# EAGLE board WarningFlasher (EAGLE 5.11)
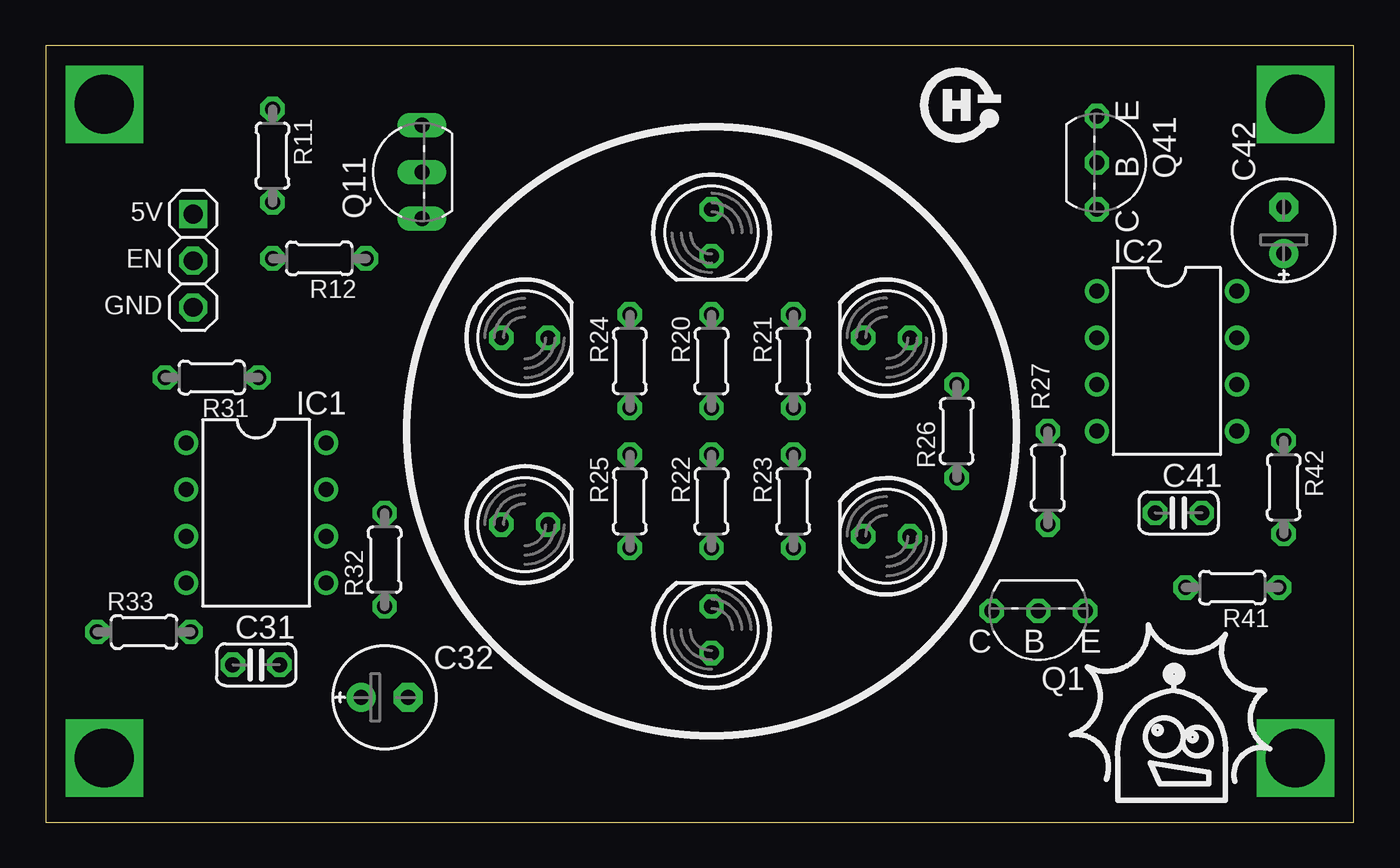
[diagram p0: board, top side]
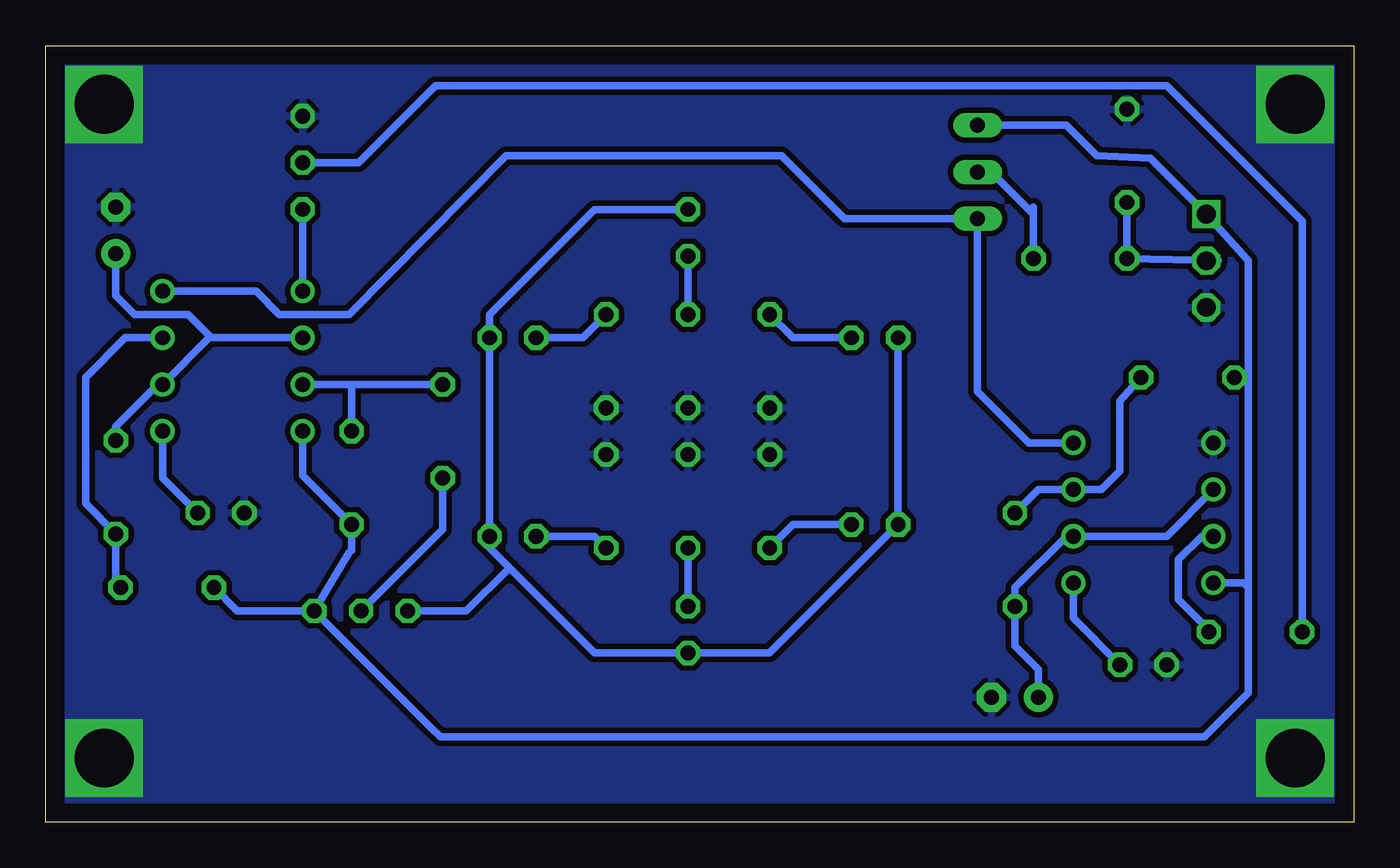
[diagram p1: board, bottom side, seen from below]

Size 71.11 x 42.22 mm. Coordinates in mm from the lower left corner, seen from the top.
Outline: 0,42.22 0,0 71.11,0 71.11,42.22 0,42.22
Copper layers (1*16): Top 0.035mm / dielectric 1.5mm / Bottom 0.035mm
Design rules "default": minimum track width 10mil, minimum drill 24mil, track to track 8mil, track to pad 8mil, pad to pad 8mil, via to via 8mil, smd to smd 8mil, copper to edge 40mil, drill to drill 8mil, minimum pad ring 10mil, minimum via ring 8mil, stop-mask expansion 4mil, vias tented up to drill 0mil, thermal gap 10mil

## Footprints (pad centres in the part's own frame; a part is rotated, then mirrored left to right if it is on the bottom)
C025-024X044 = drill 0.813 octagon: 1 -1.27,0; 2 1.27,0
E2,5-6E = drill 0.813 pad 1.575 round: + -1.27,0 | drill 0.813 pad 1.575 octagon: - 1.27,0
DIL08 = drill 0.813 pad 1.27 round: 1 -3.81,-3.81; 2 -1.27,-3.81; 3 1.27,-3.81; 4 3.81,-3.81; 5 3.81,3.81; 6 1.27,3.81; 7 -1.27,3.81; 8 -3.81,3.81
1X03-S = drill 1.016 square: 1 -2.54,0 | drill 1.016 octagon: 2 0,0; 3 2.54,0
LED5MM = drill 0.813 octagon: A -1.27,0; K 1.27,0
TO92-CBE = drill 0.813 octagon: B 0,0; C 2.54,0; E -2.54,0
TO92-CBE' = drill 0.813 long: B 0,0; C -2.54,0; E 2.54,0
0204/5 = drill 0.813 octagon: 1 -2.54,0; 2 2.54,0

## Placement (x,y rotation side)
C31  0.01uF  [C025-024X044]  11.43,8.56 180 top
C32  1uF  [E2,5-6E]  18.41,6.78 0 top
C41  0.01uF  [C025-024X044]  61.59,16.81 180 top
C42  1uF  [E2,5-6E]  67.31,32.18 90 top
IC1  NE555  [DIL08]  11.43,16.81 270 top
IC2  NE555  [DIL08]  60.96,25.07 270 top
JP1  MCU  [1X03-S]  8,30.53 270 top
LED1  YEL  [LED5MM]  36.2,32.05 270 top
LED2  YEL  [LED5MM]  45.72,26.34 180 top
LED3  YEL  [LED5MM]  36.2,10.46 90 top
LED4  YEL  [LED5MM]  45.72,15.54 180 top
LED5  YEL  [LED5MM]  26.04,26.34 0 top
LED6  YEL  [LED5MM]  26.04,16.18 0 top
Q1  2N4402  [TO92-CBE]  53.98,11.48 180 top
Q11  ZTX749  [TO92-CBE']  20.45,35.36 90 top
Q41  2N4401  [TO92-CBE]  57.15,35.87 270 top
R11  10K  [0204/5]  12.32,36.25 270 top
R12  1K  [0204/5]  14.86,30.66 180 top
R20  82  [0204/5]  36.2,25.07 90 top
R21  82  [0204/5]  40.64,25.07 90 top
R22  82  [0204/5]  36.2,17.45 270 top
R23  82  [0204/5]  40.64,17.45 270 top
R24  82  [0204/5]  31.75,25.07 90 top
R25  82  [0204/5]  31.75,17.45 270 top
R26  1K  [0204/5]  49.53,21.26 90 top
R27  10K  [0204/5]  54.48,18.72 90 top
R31  100K  [0204/5]  9.02,24.18 180 top
R32  22K  [0204/5]  18.41,14.28 90 top
R33  1K  [0204/5]  5.33,10.34 0 top
R41  33K  [0204/5]  64.52,12.75 180 top
R42  330K  [0204/5]  67.31,18.21 270 top
U$1  OSHW-LOGO  [OSHW-LOGO]  49.53,39.04 0 top
U$2  BOT-THOUGHTS  [BOT-THOUGHTS]  61.59,3.48 0 top

## Library data of the parts
C31 C32 C41 C42 R11 R12 R20-R27 R31-R33 R41 R42 = rcl
IC1 IC2 = linear
JP1 = pinhead-2
LED1-LED6 = led
Q1 Q41 U$2 = mes
Q11 = transistor-neu-to92
U$1 = SparkFun

## Nets
ENABLE: JP1.2 R11.2 R12.2
GND: C31.2 C32.- C41.2 C42.- IC1.1 JP1.3 Q41.E R11.1 R20.1 R21.1 R22.1 R23.1 R24.1 R25.1
N$1: IC2.3 R26.2 R27.2
N$2: C41.1 IC2.5
N$3: IC1.3 R33.2
N$4: IC2.1 Q41.C
N$5: Q41.B R33.1
N$6: LED1.K R20.2
N$7: Q11.B R12.1
N$8: LED1.A LED2.A LED3.A LED4.A LED5.A LED6.A Q1.C
N$9: C31.1 IC1.5
N$10: LED5.K R24.2
N$11: C32.+ IC1.2 IC1.6 R32.1
N$12: LED2.K R21.2
N$13: IC1.7 R31.1 R32.2
N$14: LED6.K R25.2
N$15: IC2.7 R41.1 R42.2
N$16: IC1.8 IC2.8 Q11.C
N$17: C42.+ IC2.2 IC2.6 R42.1
N$18: Q1.B R26.1
N$19: LED3.K R22.2
N$22: LED4.K R23.2
VCC: IC1.4 IC2.4 JP1.1 Q1.E Q11.E R27.1 R31.2 R41.2

## Tracks (layer width: path | path; a pad name or v marks a point on that pad's centre or on a via)
ENABLE
  Bottom 0.406: R11.2 12.32,32.94 R12.2 7.37,30.53 JP1.2
GND  (via drill 3.2)
  other vias: 67.94,39.04 67.94,3.48 3.17,3.48 3.17,39.04
  pour Bottom (isolate 0.305): 70.48,41.58 70.48,0.94 0.64,0.94 0.64,41.58
N$1
  Bottom 0.406: R26.2 51.44,23.8 52.7,23.8 54.61,23.8 | 54.61,23.8 IC2.3 | R27.2 54.48,23.67 54.61,23.8
N$2
  Bottom 0.406: C41.1 64.77,18.72 IC2.5
N$3
  Bottom 0.406: R33.2 7.87,10.46 9.53,12.12 9.53,14.28 8.26,15.54 IC1.3
N$4
  Bottom 0.406: Q41.C 57.15,32.05 IC2.1
N$5
  Bottom 0.406: R33.1 2.79,32.69 2.92,32.82 10.16,40.06 44.45,40.06 49.91,40.06 54.1,35.87 Q41.B
N$6
  Bottom 0.406: R20.2 LED1.K
N$7
  Bottom 0.406: R12.1 17.4,33.07 | 17.4,33.07 17.4,33.45 | Q11.B 19.68,35.36 17.4,33.07
N$8
  Bottom 0.406: LED2.A 46.99,21.64 LED4.A 46.99,14.91 46.04,13.96 45.91,13.83 | LED2.A 46.99,27.61 41.27,33.33 40.64,33.33 LED1.A | 45.91,13.83 41.27,9.2 LED3.A 31.75,9.2 LED6.A LED5.A | LED2.A 46.99,25.7 | Q1.C 48.26,11.48 45.91,13.83
N$9
  Bottom 0.406: IC1.5 15.24,11.1 C31.1
N$10
  Bottom 0.406: LED5.K 30.48,26.34 R24.2
N$11
  Bottom 0.406: IC1.2 10.16,15.54 IC1.6 15.62,15.54 18.41,12.75 R32.1 18.41,9.58 17.14,8.31 C32.+
N$12
  Bottom 0.406: LED2.K 41.91,26.34 R21.2
N$13
  Bottom 0.406: R32.2 17.14,18.08 IC1.7 13.72,18.08 12.7,19.1 12.7,22.91 R31.1
N$14
  Bottom 0.406: LED6.K 30.48,16.18 R25.2
N$15
  Bottom 0.406: R41.1 67.31,13.01 R42.2 68.96,17.32 68.96,24.18 66.8,26.34 IC2.7
N$16
  Bottom 0.406: 20.95,32.82 Q11.C | 20.95,32.82 27.69,32.82 31.11,36.25 42.55,36.25 46.1,36.25 54.61,27.61 55.5,27.61 55.63,27.61 58.42,27.61 59.69,28.88 IC2.8 | IC1.8 17.65,20.62 20.45,23.42 20.45,32.31 20.95,32.82
N$17
  Bottom 0.406: IC2.2 62.23,26.34 | 62.23,26.34 IC2.6 65.02,23.8 67.31,21.51 R42.1 | 62.23,26.34 62.23,26.47 63.37,27.61 66.29,27.61 67.31,28.63 C42.+
N$18
  Bottom 0.406: Q1.B 49.53,15.93 R26.1
N$19
  Bottom 0.406: LED3.K R22.2
N$22
  Bottom 0.406: LED4.K 41.27,15.54 R23.2
VCC
  Bottom 0.406: Q11.E 15.62,37.9 13.97,36.25 11.05,36.12 8.89,33.96 JP1.1 5.71,30.53 5.71,24.18 | 5.71,24.18 R31.2 | 5.71,12.75 5.71,7.04 8.13,4.62 11.94,4.62 49.65,4.62 50.16,5.13 Q1.E | 5.71,12.75 5.71,24.18 | IC1.4 5.97,13.01 5.71,12.75 | Q1.E 54.61,14.66 54.48,14.78 R27.1 57.15,18.85 IC2.4 | Q1.E 60.71,11.48 R41.2

## Text on the board
tNames: 5V | EN | GND